# Altium PCB PDB.PcbDoc
Units mil, origin at the board's own origin, x right, y up, seen from the top; angles counter-clockwise.
Board outline 6000 x 4000 mil, 2 copper layers (Top Layer, Bottom Layer); 59 components, 36 nets, 188 pads, 0 vias.
Unrouted connection lines stored in the file: 128.
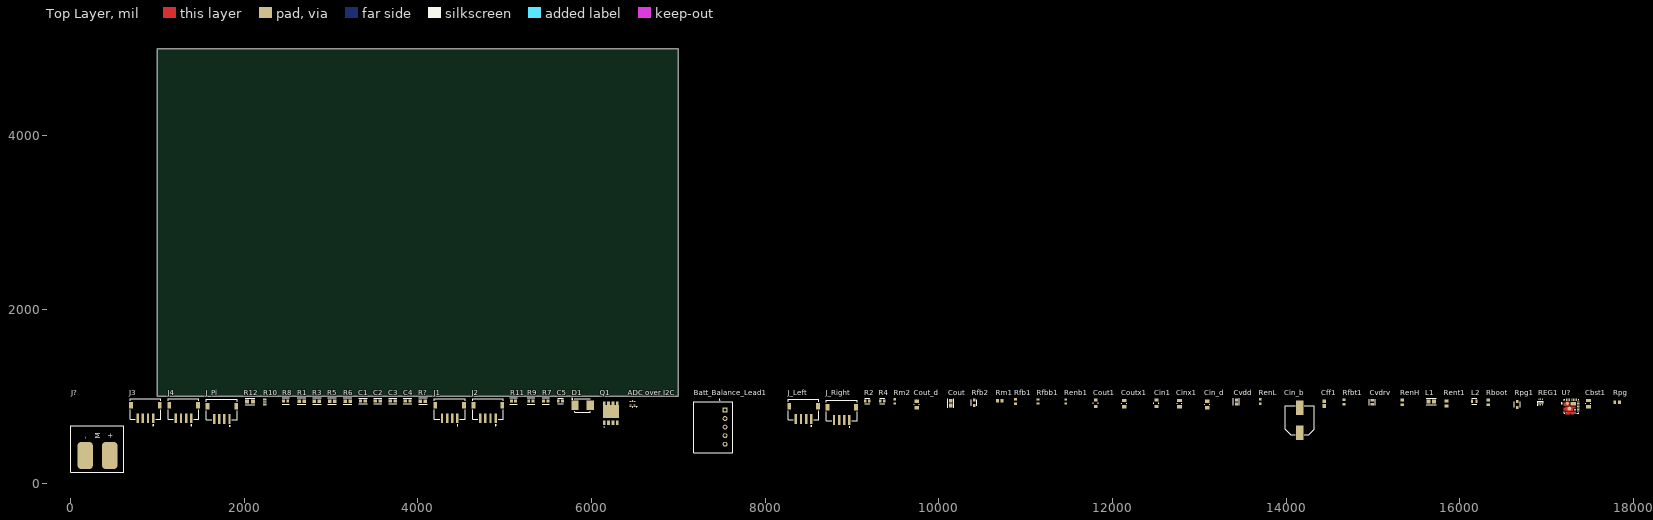
[diagram p0: Top Layer view]
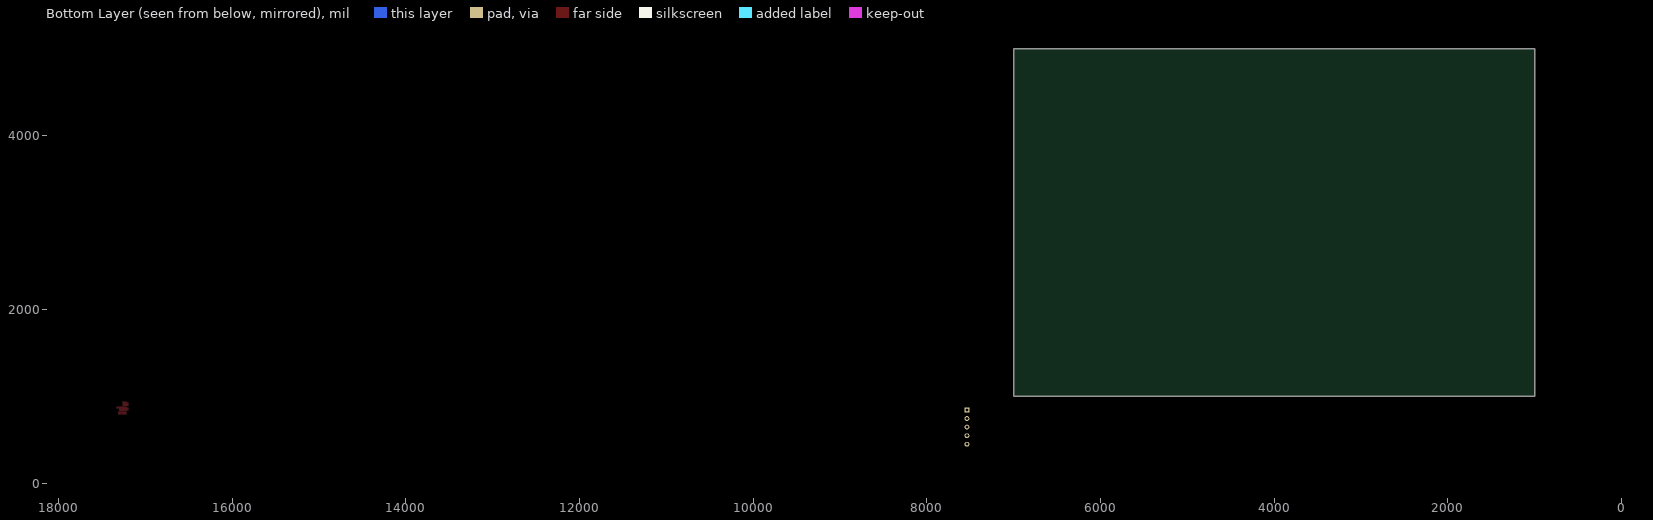
[diagram p1: Bottom Layer view, seen from below]

## Layer stack, top to bottom
Top Solder: solder mask 0.4, Solder Resist, Dk 3.5
Top Layer: signal copper 1.4
Dielectric 1: dielectric 12.6, FR-4, Dk 4.8
Bottom Layer: signal copper 1.4
Bottom Solder: solder mask 0.4, Solder Resist, Dk 3.5

## Board outline
1000,1000 7000,1000 7000,5000 1000,5000

## Design rules (kind name [scope] priority, off if disabled: settings)
BoardOutlineClearance [All] p1: gap=7.87 ignorepadtopadclearanceinfootprint=FALSE
Clearance [All] p1: gap=5 ignorepadtopadclearanceinfootprint=FALSE except(9.84: Arc-Hole Track-Hole SMDPad-Hole THPad-Hole Via-Hole Fill-Hole Poly-Hole Region-Hole Text-Hole)
ComponentClearance [All] p1: gap=5 collisioncheckmode=3 verticalgap=5 showdistances=TRUE
DiffPairsRouting [All] p1: maxlimit=10 minlimit=5 mostfreqgap=5 toplayer_minwidth=5 toplayer_maxwidth=1000 toplayer_prefwidth=5 bottomlayer_minwidth=5 bottomlayer_maxwidth=1000 bottomlayer_prefwidth=5 maxuncoupledlength=500
Height [All] p1: minheight=0 maxheight=71497.94 prefheight=500
HoleSize [All] p1: absolutevalues=TRUE maxlimit=248.03 minlimit=11.81 maxpercent=80.000 minpercent=20.000
HoleToHoleClearance [All] p1: gap=9.84 allowstackedmicrovias=FALSE
MinimumAnnularRing [All] p1: minimumring=3
MinimumSolderMaskSliver [All] p1: minsoldermaskwidth=0
PlaneClearance [All] p1: clearance=5
PlaneConnect PlaneConnectPowerPads [InPadClass('PowerPads')] p1: planeconnectstyle=Direct reliefexpansion=20 reliefentries=4 reliefconductorwidth=10 reliefairgap=10
PlaneConnect [All] p2: pad.planeconnectstyle=Relief pad.reliefexpansion=11.81 pad.reliefentries=4 pad.reliefconductorwidth=5 pad.reliefairgap=5 via.planeconnectstyle=Direct via.reliefexpansion=11.81 via.reliefentries=4 via.reliefconductorwidth=5 via.reliefairgap=5
PolygonConnect PolygonConnectPowerPads [All vs (InPadClass('PowerPads'))] p1: connectstyle=Direct reliefconductorwidth=10 reliefentries=4 polygonreliefangle="90 Angle" airgapwidth=10
PolygonConnect [All] p2: thpad.connectstyle=Relief thpad.reliefconductorwidth=5 thpad.reliefentries=4 thpad.polygonreliefangle="90 Angle" thpad.airgapwidth=5 smdpad.connectstyle=Relief smdpad.reliefconductorwidth=5 smdpad.reliefentries=4 smdpad.polygonreliefangle="90 Angle" smdpad.airgapwidth=5 via.connectstyle=Direct via.reliefconductorwidth=5 via.reliefentries=4 via.polygonreliefangle="90 Angle" via.airgapwidth=5
RoutingVias [All] p1: holewidth=11.81 width=23.62 viastyle="Through Hole" minholewidth=11.81 minwidth=23.62 maxholewidth=23.62 maxwidth=259.84
SilkToSilkClearance [All] p1: silktosilkclearance=0
SilkToSolderMaskClearance [IsPad] p1: minsilkscreentomaskgap=5 clearancetoexposedcopper=TRUE
SolderMaskExpansion [All] p1: expansion=2.95 istentingtop=FALSE
Width [All] p1: maxlimit=1000 minlimit=5 preferedwidth=5 minimp=50.000000 maximp=50.000000 favimp=50.000000
20 further rules are at their usual default settings.

## Components (designator, comment, footprint, x,y, rotation, side; value= is the part's Value field where it differs from the comment)
"ADC over I2C" "TLA2024IRUGT" ADS1018IRUGT 6471.5,910 r90 top
Batt_Balance_Lead1 "S5B-XH-A(LF)(SN)" FP-S5B-XH-A_LF_SN-MFG 7401.5,645 r90 top
C1 "0.47uF" FP-GRM188-0_1-e0_2_0_5-IPC_B 3366.5,945 r0 top
C2 "0.47uF" FP-GRM188-0_1-e0_2_0_5-IPC_B 3536.5,945 r0 top
C3 "0.47uF" FP-GRM188-0_1-e0_2_0_5-IPC_B 3711.5,945 r0 top
C4 "0.47uF" FP-GRM188-0_1-e0_2_0_5-IPC_B 3881.5,945 r0 top
C5 "0.1uF" FP-C0603-CJ-MFG 5641.5,945 r0 top value=100nF
Cbst1 "100nF" FP-CC0805-0_85-MFG 17481.5,915 r90 top value="100 nF"
Cff1 "10pF" CAPC1608X90X40ML10T20 14436.5,915 r90 top
Cin1 "22uF" FP-C2012-125-0_2-MFG 12506.5,920 r90 top
Cin_b "220uF" PNSC-EEE-FK1E221P_N 14156.5,725 r90 top
Cin_d "100nF" FP-CC0805-0_85-MFG 13091.5,905 r90 top value="100 nF"
Cinx1 "100nF" FP-CC0805-0_85-MFG 12771.5,915 r90 top value="100 nF"
Cout "47uF" FP-GRM188-0_2-IPC_B 10136.5,920 r90 top
Cout1 "22uF" FP-C2012-125-0_2-MFG 11806.5,920 r90 top
Cout_d "100nF" FP-CC0805-0_85-MFG 9746.5,905 r90 top value="100 nF"
Coutx1 "100nF" FP-CC0805-0_85-MFG 12136.5,915 r90 top value="100 nF"
Cvdd "1uF" FP-0603-L_1_6_0_15-W_0_8-IPC_C 13426.5,935 r90 top
Cvdrv "4.7uF" FP-C0603-CG-MFG 14991.5,930 r90 top
D1 "11.1V" ONSC-SMB-2-403A-03_J_V 5896.5,895 r0 top
J1 "S4B-ZR-SM4A-TF(LF)(SN)" FP-S4B-ZR-SM4A-TF_LF_SN-MFG 4366.5,855 r0 top
J2 "S4B-ZR-SM4A-TF(LF)(SN)" FP-S4B-ZR-SM4A-TF_LF_SN-MFG 4806.5,855 r0 top
J3 "S4B-ZR-SM4A-TF(LF)(SN)" FP-S4B-ZR-SM4A-TF_LF_SN-MFG 861.5,855 r0 top
J4 "S4B-ZR-SM4A-TF(LF)(SN)" FP-S4B-ZR-SM4A-TF_LF_SN-MFG 1301.5,855 r0 top
J? "XT60PT-M" XT60PT-M 311.5,550 r90 top
J_Left "S4B-ZR-SM4A-TF(LF)(SN)" FP-S4B-ZR-SM4A-TF_LF_SN-MFG 8441.5,845 r0 top
J_Pi "S4B-ZR-SM4A-TF(LF)(SN)" FP-S4B-ZR-SM4A-TF_LF_SN-MFG 1741.5,845 r0 top
J_Right "S4B-ZR-SM4A-TF(LF)(SN)" FP-S4B-ZR-SM4A-TF_LF_SN-MFG 8881.5,835 r0 top
L1 "4.7uH" FP-MLZ1608-IPC_A 15671.5,940 r0 top
L2 "1uH" FP-CBMF1608-MFG 16166.5,945 r0 top
Q1 "XPH4R714MC,L1XHQ" XPH4R714MC 6221.5,695 r0 top
R1 "100Ohm" FP-ERA3A-IPC_B 2661.5,945 r0 top
R2 "5.1kOhm" FP-CRCW0603-e3-IPC_C 9176.5,945 r0 top
R3 "100Ohm" FP-ERA3A-IPC_B 2836.5,945 r0 top
R4 "5.1kOhm" FP-CRCW0603-e3-IPC_C 9346.5,945 r0 top
R5 "100Ohm" FP-ERA3A-IPC_B 3011.5,945 r0 top
R6 "100Ohm" FP-ERA3A-IPC_B 3191.5,945 r0 top
R7 "10kOhm" FP-ERA3A-IPC_C 5471.5,945 r0 top
R8 "10kOhm" FP-ERA3A-IPC_C 2476.5,945 r0 top
R9 "10kOhm" FP-ERA3A-IPC_C 5301.5,945 r0 top
R10 "20kOhm" FP-ERA3A-MFG 2236.5,935 r90 top
R11 "10kOhm" FP-ERA3A-IPC_C 5101.5,945 r0 top
R12 "30kOhm" FP-ERJ3EK-IPC_A 2066.5,940 r0 top
R? "100Ohm" FP-ERA3A-IPC_B 4056.5,945 r0 top
Rboot "3.3Ohm" RESC1608X55X30NL15T15 16326.5,930 r90 top
REG1 "TPS564257DRLR" SOTFL50P160X60-6N 16931.5,935 r90 top
Renb1 "30kOhm" RESC1609X50X30LL10T20 11461.5,940 r90 top
RenH "562kOhm" RESC1608X55X30NL15T15 15336.5,930 r90 top
RenL "309kOhm" RESC1608X55X30LL15T15#1 13701.5,940 r90 top
Rent1 "255kOhm" RESC1608X55X30ML15T15 15846.5,915 r90 top
Rfb1 "113kOhm" RESC1608X55X30LL15T15#1 10881.5,940 r90 top
Rfb2 "10kOhm" FP-AC0603-MFG 10406.5,925 r90 top
Rfbb1 "30kOhm" RESC1609X50X30LL10T20 11141.5,940 r90 top
Rfbt1 "220kOhm" RESC1608X55X30LL15T15#2 14666.5,935 r90 top
Rm1 "100kOhm" RESC1608X55X30NL15T15 10701.5,950 r0 top
Rm2 "200kOhm" RESC1608X55X25LL10T15 9491.5,940 r90 top
Rpg "100kOhm" RESC1608X55X30NL15T15 17811.5,930 r0 top
Rpg1 "10kOhm" FP-AC0603-MFG 16661.5,905 r90 top
U? "SIC431AED-T1-GE3" FP-T22-0442-MFG 17286.5,885 r0 top

## Footprints (in the part's own frame and the unit in brackets; to place one, negate y for a bottom-side part, rotate by r counter-clockwise, add the part's x,y. Pads: shape width x height; smd on the part's side, far side on the other; paste and mask are expansions set on the pad)
ADS1018IRUGT [mm]
  rect 0.3x0.58 smd: 1(-0.75,-0.64) 4(0.75,-0.64) 6(0.75,0.64) 9(-0.75,0.64)
  rect 0.25x0.58 smd: 2(-0.25,-0.64) 3(0.25,-0.64) 7(0.25,0.64) 8(-0.25,0.64)
  rect 0.63x0.35 smd: 5(0.86,0) 10(-0.86,0)
  silkscreen extent -0.8,-1.25 -0.7,-1.15, body extent -1,-0.75 1,0.75, height 0.4
CAPC1608X90X40ML10T20 [mm] "Chip Capacitor, 2-Leads, Body 1.7x0.9mm, IPC Low Density"
  rect 1.05x1.05 smd: 1(-0.675,0) 2(0.675,0)
  body extent -0.85,-0.45 0.85,0.45, height 0.9
FP-0603-L_1_6_0_15-W_0_8-IPC_C [mil]
  rect 33.77x33.94 smd paste+0 mask+0: 1(-23.71,0) 2(23.71,0)
  silkscreen extent -41,-34 41,34, body extent -45,-23 45,23, height 10
FP-AC0603-MFG [mm]
  rect 0.9x0.8 smd paste+0 mask+0: 1(-0.85,0) 2(0.85,0)
  silkscreen extent -0.85,-0.82 0.85,0.82, body extent -1.4,-0.55 1.4,0.55, height 0.25
FP-C0603-CG-MFG [mm]
  rect 0.75x0.9 smd paste+0 mask+0: 1(-0.6,0) 2(0.6,0)
  silkscreen extent -0.87,-0.85 0.87,0.85, body extent -1.2,-0.6 1.2,0.6, height 0.25
FP-C0603-CJ-MFG [mm]
  rect 0.85x0.9 smd paste+0 mask+0: 1(-0.65,0) 2(0.65,0)
  silkscreen extent -0.8,-0.85 0.8,0.85, body extent -1.2,-0.6 1.2,0.6, height 0.25
FP-C2012-125-0_2-MFG [mm]
  rect 0.8x1.05 smd paste+0 mask+0: 1(-0.925,0) 2(0.925,0)
  silkscreen extent -0.15,-0.72 0.15,0.72, body extent -1.43,-0.82 1.43,0.82, height 0.25
FP-CBMF1608-MFG [mm]
  rect 0.55x1 smd paste+0 mask+0: 1(-0.625,0) 2(0.625,0)
  silkscreen extent -0.8,-0.87 0.8,0.87, body extent -1,-0.6 1,0.6, height 0.25
FP-CC0805-0_85-MFG [mm]
  rect 0.95x1.4 smd paste+0 mask+0: 1(-0.925,0) 2(0.925,0)
  silkscreen extent -0.08,-0.72 0.08,0.72, body extent -1.6,-1.05 1.6,1.05, height 0.25
FP-CRCW0603-e3-IPC_C [mil]
  rect 28.94x33.94 smd paste+0 mask+0: 1(-24.23,0) 2(24.23,0)
  silkscreen extent -30,-33 30,33, body extent -43,-23 43,23, height 10
FP-ERA3A-IPC_B [mil]
  rect 41.53x39.61 smd paste+0 mask+0: 1(-28.57,0) 2(28.57,0)
  silkscreen extent -49,-36 49,36, body extent -59,-30 59,30, height 10
FP-ERA3A-IPC_C [mil]
  rect 33.66x35.68 smd paste+0 mask+0: 1(-24.63,0) 2(24.63,0)
  silkscreen extent -41,-35 41,35, body extent -45,-24 45,24, height 10
FP-ERA3A-MFG [mm]
  rect 0.65x0.9 smd paste+0 mask+0: 1(-0.725,0) 2(0.725,0)
  silkscreen extent 0,-0.5 0,0.5, body extent -1.15,-0.6 1.15,0.6, height 0.25
FP-ERJ3EK-IPC_A [mil]
  rect 45.53x41.82 smd paste+0 mask+0: 1(-33.5,0) 2(33.5,0)
  silkscreen extent -56,-37 56,37, body extent -76,-41 76,41, height 10
FP-GRM188-0_1-e0_2_0_5-IPC_B [mil]
  rect 37.74x35.91 smd paste+0 mask+0: 1(-28.61,0) 2(28.61,0)
  silkscreen extent -47,-34 47,34, body extent -57,-28 57,28, height 10
FP-GRM188-0_2-IPC_B [mil]
  rect 43.51x39.61 smd paste+0 mask+0: 1(-27.58,0) 2(27.58,0)
  silkscreen extent -49,-36 49,36, body extent -59,-30 59,30, height 10
FP-MLZ1608-IPC_A [mil]
  rect 47.48x41.66 smd paste+0 mask+0: 1(-32.52,0) 2(32.52,0)
  silkscreen extent -56,-37 56,37, body extent -76,-41 76,41, height 10
FP-S4B-ZR-SM4A-TF_LF_SN-MFG [mm]
  rect 0.7x2.9 smd paste+0 mask+0: 1(2.25,-2.75) 2(0.75,-2.75) 3(-0.75,-2.75) 4(-2.25,-2.75)
  rect 1.1x1.9 smd paste+0 mask+0: 5(-4.2,1.05) 6(4.2,1.05)
  silkscreen extent -4.5,-4.9 4.5,3, body extent -4.85,-4.3 4.85,3.1, height 0.25
FP-S5B-XH-A_LF_SN-MFG [mm]
  rect 1.4x1.4 hole 0.9 paste-2539.97 mask+0: 1(5,-3.45)
  round 1.4 hole 0.9 paste-2539.97 mask+0: 2(2.5,-3.45) 3(0,-3.45) 4(-2.5,-3.45) 5(-5,-3.45)
  silkscreen extent -7.45,-5.75 8.17,5.75, body extent -7.55,-5.85 7.55,5.85, height 0.25
FP-T22-0442-MFG [mm]
  round 0.827 smd paste+0 mask+0: 1-2-26(-1.184,0.816)
  round 1.08 smd paste+0 mask+0: 3-4-27(-0.613,-0.675)
  round 0.272 smd paste+0 mask+0: 5-6-7-8-9(-1.444,-1.756)
  rect 0.3x0.73 smd paste+0 mask+0: 10(1.025,-1.935)
  rect 0.725x0.3 smd paste+0 mask+0: 11(1.937,-1.425) 12(1.937,-0.975) 13(1.937,-0.525) 14(1.937,-0.075) 15(1.937,0.375) 16(1.937,0.825) 17(1.937,1.275)
  rect 0.3x0.725 smd paste+0 mask+0: 18(1.475,1.937) 19(1.025,1.937) 20(0.575,1.937) 21(0.125,1.937) 22(-0.575,1.937) 23(-1.025,1.937) 24(-1.475,1.937)
  rect 1.575x1.05 smd paste+0 mask+0: 25(0.487,0.75)
  rect 0.58x0.38 smd paste+0 mask+0: 28(0.985,-0.99)
  Top Layer region: -1.625,-2.3 -1.625,-1.575 0.725,-1.575 0.725,-2.3 0.425,-2.3 0.425,-1.85 0.275,-1.85 0.275,-2.3 -0.025,-2.3 -0.025,-1.85 -0.425,-1.85 -0.425,-2.3 -0.725,-2.3 -0.725,-1.85 -0.875,-1.85 -0.875,-2.3 -1.175,-2.3 -1.175,-1.85 -1.325,-1.85 -1.325,-2.3
  Top Layer region: -2.3,-0.375 -1.75,-0.375 -1.75,-0.075 1.075,-0.075 1.075,-0.53 0.425,-0.53 0.425,-1.275 -1.75,-1.275 -1.75,-1.125 -2.3,-1.125 -2.3,-0.825 -1.75,-0.825 -1.75,-0.675 -2.3,-0.675 -2.3,-0.375
  Top Layer region: -2.3,0.975 -1.75,0.975 -1.75,1.275 -0.6,1.275 -0.6,0.225 -2.3,0.225 -2.3,0.525 -1.75,0.525 -1.75,0.675 -2.3,0.675 -2.3,0.975
  silkscreen extent -3,-2.05 2.05,2.05, body extent -2.4,-2.4 2.4,2.4, height 0.25
ONSC-SMB-2-403A-03_J_V [mil] "Molded, 2-Leads, Body 4.6x3.95mm"
  rect 85x107.99 smd: 1(-87.01,0) 2(87.01,0)
  silkscreen extent -125,-79 91,81, body extent -91,-78 91,78, height 97
PNSC-EEE-FK1E221P_N [mm] "CAPAE, 2-Leads, Body 8.5x8.5mm, IPC Medium Density"
  rect 4.2x2.1 smd: 1(-3.675,0) 2(3.675,0)
  silkscreen extent -4.25,-4.25 4.25,4.25, body extent -5,-4.25 5,4.25, height 10.5
RESC1608X55X25LL10T15 [mm] "Chip Resistor, 2-Leads, Body 1.60x0.80mm, IPC High Density"
  rect 0.6x0.8 smd: 1(-0.65,0) 2(0.65,0)
  body extent -0.85,-0.45 0.85,0.45, height 0.55
RESC1608X55X30LL15T15#1 [mm] "Chip Resistor, 2-Leads, Body 1.60x0.80mm, IPC High Density"
  rect 0.7x0.85 smd: 1(-0.625,0) 2(0.625,0)
  body extent -0.87,-0.48 0.87,0.48, height 0.55
RESC1608X55X30LL15T15#2 [mm] "Chip Resistor, 2-Leads, Body 1.75x0.95mm, IPC High Density"
  rect 0.75x0.85 smd: 1(-0.65,0) 2(0.65,0)
  body extent -0.87,-0.48 0.87,0.48, height 0.55
RESC1608X55X30ML15T15 [mm] "Chip Resistor, 2-Leads, Body 1.60x0.80mm, IPC Low Density"
  rect 0.9x1.05 smd: 1(-0.725,0) 2(0.725,0)
  body extent -0.87,-0.48 0.87,0.48, height 0.55
RESC1608X55X30NL15T15 [mm] "Chip Resistor, 2-Leads, Body 1.60x0.80mm, IPC Medium Density"
  rect 0.8x0.95 smd: 1(-0.675,0) 2(0.675,0)
  body extent -0.87,-0.48 0.87,0.48, height 0.55
RESC1609X50X30LL10T20 [mm] "Chip Resistor, 2-Leads, Body 1.55x0.85mm, IPC High Density"
  rect 0.7x0.85 smd: 1(-0.575,0) 2(0.575,0)
  body extent -0.82,-0.48 0.82,0.48, height 0.5
SOTFL50P160X60-6N [mm]
  rect 0.475x0.3 smd: 1(-0.838,0.5) 2(-0.838,0) 3(-0.838,-0.5) 4(0.838,-0.5) 5(0.838,0) 6(0.838,0.5)
  silkscreen extent -1.07,-0.8 0.25,0.9, body extent -0.8,-0.78 0.8,0.82, height 0.6
XPH4R714MC [mm]
  rect 0.85x1.45 smd: 1(-1.905,0) 2(-0.635,0) 3(0.635,0) 4(1.905,0)
  rect 0.85x1.05 smd: 5(1.905,5.7) 6(0.635,5.7) 7(-0.635,5.7) 8(-1.905,5.7)
  rect 4.7x3.75 smd: 9(0,3.3)
  silkscreen extent -1.95,-1.25 -1.86,-1.15, body extent -2.65,-0.25 2.65,5.75, height 0.95
XT60PT-M [mm]
  rect 1x1 hole 1.5 square: 8(1.15,6.75) 8(1.15,-6.65)
  rrect50% 8x4.5 smd: +(-5.9,-3.55) -(-5.9,3.65)
  silkscreen extent -10.8,-7.7 2.85,7.8

## Part data
"ADC over I2C": "Integrated Circuit", Manufacturer_Name="Texas Instruments", Mouser Part Number=595-TLA2024IRUGT, Arrow Part Number=TLA2024IRUGT, Arrow Price/Stock=https://www.arrow.com/en/products/tla2024irugt/texas-instruments?region=nac, Datasheet Link=http://www.ti.com/lit/ds/sbas846/sbas846.pdf, Height=0.4mm, Manufacturer_Part_Number=TLA2024IRUGT, Mouser Price/Stock=https://www.mouser.co.uk/ProductDetail/Texas-Instruments/TLA2024IRUGT?qs=chTDxNqvsylxt6cbA39OGw%3D%3D
Batt_Balance_Lead1: library part CMP-17439-000302-1, "CONN HEADER R/A 5POS 2.5MM", Color=Natural, Contact Resistance=10mR, Current Rating=3A, Flammability Rating="UL94 V-0", Insulation Resistance=1GR, Max Operating Temperature=85°C, Min Operating Temperature=-25°C, Voltage Rating=250V, Connector Type=Header, Contact Finish - Mating=TIN, Contact Material=Brass, Contact Plating=Tin, Contact Shape=Square, Contact Type="Male Pin", Fastening Type=Detent, Insulation Color=Natural, Insulation Material=Nylon, Lead Free="Lead Free", Lead Pitch=2.5mm, Mount="Through Hole", Number of Contacts=5, Number of Positions=5, Number of Rows=1, Orientation="Right Angle", Packaging=Bulk, Pitch=2.5mm, REACH SVHC="No SVHC", Series=XH, Termination=Solder, Voltage Rating (AC)=250V, Wire/Cable Gauge=22AWG
C1 C2 C3 C4: library part CMP-2006-02860-2, "Chip Multilayer Ceramic Capacitors for General Purpose, 0603, 0.47uF, X7R, 15%, 10%, 16V", Capacitance=470nF, Case Code (Imperial)=0603, Case Code (Metric)=1608, Dielectric=X7R, Max Operating Temperature=125°C, Min Operating Temperature=-55°C, Package Quantity=1, Tolerance=10%, Voltage=16V, Case/Package=0603, Depth=0.8mm, Height=0.8mm, Lead Free="Lead Free", Length=1.6mm, Material=Ceramic, Mount="Surface Mount", Number of Pins=2, Packaging="Tape and Reel", REACH SVHC="No SVHC", Termination=SMD/SMT, Thickness=0.035inch, Voltage Rating=16V, Voltage Rating (DC)=16V, Width=0.8mm
C5: library part CMP-2006-03300-2, "CAP CER 0.1UF 50V X7R 0603", Capacitance=100nF, Manufacturer=Kemet, Manufacturer Part Number=C0603X104K5RACTU, Package=C0603-CJ, Temperature="-55°C to +125°C", Temperature Characteristic=X7R, Temperature Coefficient=15%, Temperature Range High=+125°C, Temperature Range Low=-55°C, Tolerance=10%, Voltage=50V, Automotive=No, Category=Cap, ComponentLink2Description=Datasheet, ComponentLink2URL=https://content.kemet.com/datasheets/KEM_C1013_X7R_FT-CAP_SMD.pdf, Device Class L1="Passive Components", Device Class L2=Capacitors, Device Class L3="Ceramic Capacitors", Digikey Description="CAP CER 0.1UF 50V X7R 0603", Height=0.95mm, Ipc Land Pattern Name=CAPC16080X80, Lead Free=Yes, Material=Ceramic, Mouser Description="Capacitor; Ceramic; Cap 0.1uF; Tol+10%; SMT; Flexible Termination; Vol-Rtg 50V; TR", Octopart=https://octopart.com/c0603x104k5ractu-kemet-9145062, RoHS=TRUE, Voltage Rating=50V
Cbst1 Cin_d Cinx1 Cout_d Coutx1: library part CMP-1036-04410-2, "CAP CER 0.1UF 25V X7R 0805", Capacitance="100 nF", Manufacturer=Yageo, Manufacturer Part Number=CC0805KRX7R8BB104, Package=CC0805-0.85, Temperature="-30°C to +85°C", Temperature Characteristic=X7R, Temperature Range High=+85°C, Temperature Range Low=-30°C, Tolerance=0.1, Voltage Rating="25 V", Automotive=No, Category=Cap, ComponentLink2Description=Datasheet, ComponentLink2URL=http://www.yageo.com/documents/recent/UPY-GPHC_Y5V_6.3V-to-50V_8.pdf, Device Class L1="Passive Components", Device Class L2=Capacitors, Device Class L3="Ceramic Capacitors", Digikey Description="CAP CER 0.1UF 25V X7R 0805", Footprint Url=http://www.yageo.com/exep/pages/download/literatures/UPY-C_GEN_24.pdf, Height=0.95mm, Ipc Land Pattern Name=CAPC200125X85, Lead Free=Yes, Material=Ceramic, Mouser Description="Multilayer Ceramic Capacitors MLCC - SMD/SMT 100nF 25V X7R 10%", Octopart=https://octopart.com/cc0805krx7r8bb104-yageo-39467766, RoHS=TRUE
Cff1: library part CMP-2100-03593-1, "Chip Capacitor, 10 pF, +/- 5%, 50 V, -55 to 125 degC, 0603 (1608 Metric), RoHS, Tape and Reel", Case Code (Imperial)=0603, Case Code (Metric)=1608, Dielectric=C0G, Insulation Resistance=100GR, Manufacturer=Yageo, Max Operating Temperature=125degC, Min Operating Temperature=-55degC, Package Description="2-Pin Surface Mount Device, Body 1.6 x 0.8 mm", Package Quantity=1, Temperature Coefficient=30ppm/degC, Tolerance=5%, Voltage=50V, Capacitance=10pF, Case/Package=0603, Composition=Ceramic, Datasheet URL=http://www.yageo.com/documents/recent/UPY-GP_NP0_16V-to-50V_14.pdf, Datasheet Version="Rev. 14, 07/2016", Depth=0.8mm, Height=0.8mm, Lead Free=LeadFree, Length=1.6mm, Manufacturer URL=http://www.yageo.com/, Mount=SurfaceMount, Number of Pins=2, Package Reference=0603, Packaging=TapeandReel, Radiation Hardening=No, REACH SVHC=NoSVHC, RoHSCompliant=True, Termination=SMD/SMT, Thickness=0.035inch, Voltage Rating=50V, Voltage Rating (DC)=50V, Width=0.031inch
Cin1 Cout1: library part CMP-08246-000038-3, "CAP CER 22UF 25V X5R 0805", Capacitance=22µF, Case Code (Imperial)=0805, Case Code (Metric)=2012, Dielectric=X5R, Dielectric Material=Ceramic, Manufacturer Lifecycle Status=PRODUCTION, Max Operating Temperature=85°C, Min Operating Temperature=-55°C, Tolerance=20%, Voltage Rating=25V, Case/Package=0805, Composition=Ceramic, Depth=1.25mm, Height=1.25mm, Lead Free="Lead Free", Length=2mm, Lifecycle Status=Production, Material=Ceramic, Max Length=2.2mm, Max Width=1.45mm, Min Length=1.8mm, Min Width=1.05mm, Mount="Surface Mount", NexarPartId=26013714, Packaging="Cut Tape (CT)", REACH SVHC="No SVHC", RoHS=Compliant, Schedule B="8532240020, 8532240020", Termination=SMD/SMT, Thickness=1.4478mm, Voltage Rating (DC)=25V, Weight=5.499807mg, Width=1.25mm
Cin_b: library part CMP-1665-00017-3, "Aluminum Electrolytic Capacitor, 220 uF, +/- 20%, 25 V, -55 to 105 degC, 2-Pin CAPAE, RoHS, Tape and Reel", Manufacturer=Panasonic, Max Operating Temperature="105 degC", Min Operating Temperature="-55 degC", Package Quantity=500, Voltage Rating="25 V", ComponentLink1Description="Manufacturer URL", ComponentLink1URL=http://www.panasonic.com/, ComponentLink2Description=Datasheet, ComponentLink2URL=http://industrial.panasonic.com/cdbs/www-data/pdf/RDE0000/ABA0000C1181.pdf, DatasheetVersion=03/2016, Height="10.2 mm", Lead Pitch="3.1 mm", Length="10.2 mm", Mount="Surface Mount", Mounting Technology="Surface Mount", PackageDescription="2-Pin Electrolytic Aluminum Capacitor, Body 8.3 x 8.3 mm", PackageReference=EEE-FK1E221P, Packaging="Tape and Reel", Pins=2, REACH SVHC="No SVHC", RoHSCompliant=true
Cout: library part CMP-2000-05444-2, "Chip Multilayer Ceramic Capacitors for General Purpose, 0603, 47uF, X5R, 15%, 20%, 6.3V", Case Code (Imperial)=0603, Case Code (Metric)=1608, Dielectric=X5R, Max Operating Temperature=85°C, Min Operating Temperature=-55°C, Tolerance=20%, Voltage Rating=6.3V, Capacitance=47uF, Case/Package=0603, Length=0.063inch, Mount="Surface Mount", Packaging="Tape and Reel", Thickness=0.039inch, Voltage Rating (DC)=6.3V, Width=0.031inch
Cvdd: library part CMP-2000-07531-4, "Ceramic Capacitor General Use 1uF ±10% 50V X7R 0603", Case Code (Imperial)=0603, Case Code (Metric)=1608, Dielectric=X7R, Max Operating Temperature=125°C, Min Operating Temperature=-55°C, Package Quantity=1, Tolerance=10%, Voltage Rating=50V, Capacitance=1uF, Case/Package=0603, Construction=Flat, Depth=0.8mm, Halogen Free="Halogen Free", Height=0.8mm, Length=1.6mm, Mount="Surface Mount", Packaging="Tape and Reel", Radiation Hardening=No, RoHS Compliant=Yes, Series=M, Termination=SMD/SMT, Thickness=0.037inch, Voltage Rating (DC)=50V, Width=0.031inch
Cvdrv: library part CMP-2006-02256-2, "CAP CER 4.7UF 6.3V X5R 0603", Manufacturer=Kemet, Manufacturer Part Number=C0603C475K9PACTU, Package=C0603-CG, Temperature="-55°C to +85°C", Temperature Characteristic=X5R, Temperature Coefficient=15%, Temperature Range High=+85°C, Temperature Range Low=-55°C, Tolerance=10%, Voltage Rating=6.3V, Automotive=No, Capacitance=4.7uF, Category=Cap, ComponentLink2Description=Datasheet, ComponentLink2URL=https://content.kemet.com/datasheets/KEM_C1006_X5R_SMD.pdf, Device Class L1="Passive Components", Device Class L2=Capacitors, Device Class L3="Ceramic Capacitors", Digikey Description="CAP CER 4.7UF 6.3V X5R 0603", Height=0.9mm, Ipc Land Pattern Name=CAPC16080X80, Lead Free=Yes, Material=Ceramic, Mouser Description="Multilayer Ceramic Capacitors MLCC - SMD/SMT 6.3volts 4.7uF X5R 10%", Octopart=https://octopart.com/c0603c475k9pactu-kemet-104242, RoHS=TRUE
D1: library part CMP-1061-00396-1, "600 W Peak Power Zener Transient Voltage Suppressor, Unidirectional, 2-Pin SMB, Pb-Free, Tape and Reel", Manufacturer="On Semiconductor", PartNumber=P6SMB13AT3G, ComponentLink1Description="Manufacturer URL", ComponentLink1URL=http://www.onsemi.com/, ComponentLink2Description=Datasheet, ComponentLink2URL=http://www.onsemi.com/pub_link/Collateral/P6SMB6.8AT3-D.PDF, ComponentLink3Description="Package Specification", ComponentLink3URL=http://www.onsemi.com/pub_link/Collateral/P6SMB6.8AT3-D.PDF, DatasheetVersion="Rev. J", Direction=Unidirectional, IR Max (uA)=5, Mounting Technology="Surface Mount", PackageDescription="2-Pin Small Molded Package, J-Bend Lead, Body 4.33 x 3.625 mm", PackageReference=SMB-2-403A-03_J, PackageVersion="Rev. J, 07/2012", Packing="Tape and Reel", PPK Max (W)=600, RoHS=Pb-Free, V(BR) Typ (V)=13.05
J1 J2 J3 J4 J_Left J_Pi J_Right: library part CMP-17439-000081-1, "CONN HEADER SMD R/A 4POS 1.5MM", Color=Natural, Contact Resistance=30mR, Current Rating=1A, Flammability Rating="UL94 V-0", Housing Color=Beige, Max Operating Temperature=85°C, Max Voltage Rating (AC)=50V, Min Operating Temperature=-25°C, Connector Type=Header, Contact Finish - Mating=TIN, Contact Material=Brass, Contact Plating=Copper, Contact Shape=Circular, Contact Type="Male Pin", Depth=6.5mm, Fastening Type=Detent, Gender=Male, Height=7.2mm, Housing Material=Polyamide, Insulation Color=Natural, Insulation Material=Nylon, Lead Free="Lead Free", Length=9mm, Max Current Rating=1A, Max Voltage Rating (DC)=50V, Mount="Surface Mount", Number of Contacts=4, Number of Positions=4, Number of Rows=1, Orientation="Right Angle", Packaging="Tape and Reel", Pitch=1.5mm, Series=ZH, Termination=Solder, Voltage Rating=50V, Width=3.5mm
J?: "Male SMT XT60 Connector"
L1: library part CMP-08253-000311-1, "Shielded Multilayer Inductor 4.7uH ±20% 350mA 650mΩ SMD 0603", Case Code (Imperial)=0603, Case Code (Metric)=1608, Current Rating=350mA, DC Resistance (DCR)=650mR, Max Operating Temperature=125°C, Min Operating Temperature=-55°C, Package Quantity=4000, Saturation Current=120mA, Self Resonant Frequency=80MHz, Test Frequency=2MHz, Tolerance=20%, Case/Package=0603, Core Material=Ferrite, Height - Seated (Max)=0.037inch, Inductance=4.7uH, Length=0.063inch, Mount="Surface Mount", Packaging="Tape and Reel", RoHS Compliant=Yes, Shielding=Shielded, Width=0.031inch
L2: library part CMP-14484-000279-1, "FIXED IND 1UH 770MA 117 MOHM SMD", Case Code (Imperial)=0603, Case Code (Metric)=1608, Current Rating=770mA, DC Resistance (DCR)=117mR, Inductance Tolerance=20%, Max Operating Temperature=105°C, Min Operating Temperature=-40°C, Package Quantity=1, Resistor Type=Wirewound, Saturation Current=290mA, Self Resonant Frequency=100MHz, Test Frequency=7.96MHz, Case/Package=0603, Core Material=Ferrite, DC Current=770mA, Depth=1mm, Halogen Free="Halogen Free", Height=0.8mm, Height - Seated (Max)=0.039inch, Inductance=1uH, Lead Free="Lead Free", Length=1.6mm, Max DC Current=770mA, Military Standard=Not, Mount="Surface Mount", Packaging="Tape and Reel", Radiation Hardening=No, RoHS Compliant=Yes, Series=CBMF, Shielding=Unshielded, Termination=SMD/SMT, Tolerance=20%, Width=0.031inch
Q1: "MOSFET (P-Channel)", Manufacturer_Name=Toshiba, Mouser Part Number=757-XPH4R714MC,L1XHQ, Arrow Part Number=XPH4R714MC,L1XHQ, Arrow Price/Stock=https://www.arrow.com/en/products/xph4r714mcl1xhq/toshiba?region=nac, Datasheet Link=https://toshiba.semicon-storage.com/info/docget.jsp?did=66018&prodName=XPH4R714MC, Manufacturer_Part_Number=XPH4R714MC,L1XHQ, Mouser Price/Stock=https://www.mouser.co.uk/ProductDetail/Toshiba/XPH4R714MCL1XHQ?qs=7MVldsJ5Uay5UfLPuZnPLQ%3D%3D
R1 R3 R5 R6 R?: library part CMP-2000-00870-2, "RES SMD 100 OHM 0.1% 1/10W 0603", Case Code (Imperial)=0603, Case Code (Metric)=1608, Max Operating Temperature=155°C, Max Power Dissipation=100mW, Min Operating Temperature=-55°C, Package Quantity=5000, Resistance=100R, Resistance Tolerance=0.1%, Resistor Type="Thin Film", Temperature Coefficient=25ppm/°C, Voltage Rating=75V, Case/Package=0603, Construction=Rectangular, Contact Plating=Tin, Depth=0.8mm, Height=0.45mm, Length=1.6mm, Military Standard=Not, Mount="Surface Mount", Number of Pins=2, Number of Terminations=2, Packaging="Tape and Reel", Power Rating=100mW, Radiation Hardening=No, REACH SVHC="No SVHC", RoHS Compliant=Yes, Series=ERA-3A, Size Code=0603, Technology="METAL FILM", Termination=SMD/SMT, Tolerance=0.1%, Width=0.8mm
R2 R4: library part CMP-1012-00590-3, "RES Thick Film, 5.1kΩ, 1%, 0.1W, 100ppm/°C, 0603", Case Code (Imperial)=0603, Case Code (Metric)=1608, Max Operating Temperature=155°C, Min Operating Temperature=-55°C, Package Quantity=5000, Power Rating=100mW, Resistance=5.1kR, Temperature Coefficient=100ppm/°C, Tolerance=1%, Voltage Rating=75V, Case/Package=0603, Composition="Thick Film", Contact Plating=Tin, Depth=0.85mm, Height=0.45mm, Lead Free="Lead Free", Length=1.55mm, Military Standard=Not, Mount="Surface Mount", Packaging="Tape and Reel", Radiation Hardening=No, Termination=SMD/SMT, Voltage Rating (DC)=75V, Weight=7.1E-05oz, Width=0.85mm
R7 R8 R9 R11: library part CMP-2000-00874-2, "RES SMD 10K OHM 0.1% 1/10W 0603", Case Code (Imperial)=0603, Case Code (Metric)=1608, Max Operating Temperature=155°C, Max Power Dissipation=100mW, Min Operating Temperature=-55°C, Package Quantity=5000, Resistance=10kR, Resistance Tolerance=0.1%, Resistor Type="Thin Film", Temperature Coefficient=25ppm/°C, Voltage Rating=75V, Case/Package=0603, Construction=Rectangular, Contact Plating=Tin, Depth=0.8mm, Height=0.45mm, Lead Free="Lead Free", Length=1.6mm, Military Standard=Not, Mount="Surface Mount", Number of Pins=2, Number of Terminations=2, Packaging="Tape and Reel", Power Rating=100mW, Radiation Hardening=No, REACH SVHC="No SVHC", RoHS Compliant=Yes, Series=ERA-3A, Size Code=0603, Technology="METAL FILM", Termination=SMD/SMT, Tolerance=0.1%, Voltage Rating (DC)=75V, Width=0.8mm
R10: library part CMP-2000-00946-2, "RES SMD 20K OHM 0.1% 1/10W 0603", Case Code (Imperial)=0603, Case Code (Metric)=1608, Max Operating Temperature=155°C, Max Power Dissipation=100mW, Min Operating Temperature=-55°C, Package Quantity=5000, Resistance=20kR, Resistance Tolerance=0.1%, Resistor Type="Thin Film", Temperature Coefficient=25ppm/°C, Voltage Rating=75V, Case/Package=0603, Construction=Rectangular, Contact Plating=Tin, Depth=0.8mm, Height=0.45mm, Lead Free="Lead Free", Length=1.6mm, Military Standard=Not, Mount="Surface Mount", Number of Pins=2, Number of Terminations=2, Packaging="Tape and Reel", Power Rating=100mW, Radiation Hardening=No, REACH SVHC="No SVHC", RoHS Compliant=Yes, Series=ERA, Size Code=0603, Technology="THIN FILM", Termination=SMD/SMT, Tolerance=0.1%, Voltage Rating (DC)=75V, Weight=7.1E-05oz, Width=0.8mm
R12: library part CMP-2000-00413-2, "RES SMD 30K OHM 1% 1/10W 0603", Case Code (Imperial)=0603, Case Code (Metric)=1608, Max Operating Temperature=155°C, Max Power Dissipation=100mW, Min Operating Temperature=-55°C, Package Quantity=1, Resistance=30kR, Resistance Tolerance=1%, Resistor Type="Thick Film", Temperature Coefficient=100ppm/°C, Voltage Rating=75V, Case/Package=0603, Construction=Rectangular, Contact Plating=Tin, Depth=0.8mm, Features="Automotive AEC-Q200", Height=0.022inch, Lead Free="Lead Free", Length=1.6mm, Military Standard=Not, Mount="Surface Mount", Number of Terminations=2, Packaging="Tape and Reel", Power Rating=100mW, Radiation Hardening=No, REACH SVHC="No SVHC", RoHS Compliant=Yes, Series=ERJ, Size Code=0603, Termination=SMD/SMT, Tolerance=1%, Voltage Rating (DC)=75V, Width=0.031inch
Rboot: library part CMP-2000-00847-1, Manufacturer=Panasonic, Part Number=ERJ-3RQF3R3V
REG1: "Integrated Circuit", Manufacturer_Name="Texas Instruments", Mouser Part Number=595-TPS564257DRLR, Datasheet Link=https://www.ti.com/lit/ds/symlink/tps564257.pdf?HQS=dis-mous-null-mousermode-dsf-pf-null-wwe&ts=1695023870951&ref_url=https%253A%252F%252Fwww.mouser.de%252F, Height=0.6mm, Manufacturer_Part_Number=TPS564257DRLR, Mouser Price/Stock=https://www.mouser.co.uk/ProductDetail/Texas-Instruments/TPS564257DRLR?qs=ulEaXIWI0c8amaZvnJWTQQ%3D%3D
Renb1 Rfbb1: library part CMP-2000-03223-1, Manufacturer="Vishay Dale", Part Number=CRCW060330K0FKEA
RenH: library part CMP-2000-00571-1, Manufacturer=Panasonic, Part Number=ERJ-3EKF5623V
RenL: library part CMP-2000-00422-1, Manufacturer=Panasonic, Part Number=ERJ-3EKF3093V
Rent1: library part CMP-1012-00780-2, Manufacturer=Panasonic, Part Number=ERJ-3EKF2553V
Rfb1: library part CMP-2000-00204-1, Manufacturer=Panasonic, Part Number=ERJ-3EKF1133V
Rfb2 Rpg1: library part CMP-2000-04818-3, "RES 10KΩ 1.00% 0.1W 0603", Case Code (Imperial)=0603, Case Code (Metric)=1608, Max Operating Temperature=155°C, Max Power Dissipation=100mW, Min Operating Temperature=-55°C, Package Quantity=1, Ratings=AEC-Q200, Resistance=10kR, Resistor Type="Thick Film", Temperature Coefficient=100ppm/°C, Tolerance=1%, Voltage Rating=50V, Case/Package=0603, Construction=Rectangular, Depth=0.8mm, Features="Moisture Resistant", Height=0.45mm, Lead Free="Lead Free", Length=1.6mm, Military Standard=Not, Mount="Surface Mount", Number of Terminations=2, Packaging="Tape and Reel", Power Rating=100mW, RoHS Compliant=Yes, Series=AC, Size Code=0603, Termination=SMD/SMT, Width=0.8mm
Rfbt1: library part CMP-2000-00338-2, "Chip Resistor, 220 KOhm, +/- 1%, 0.1 W, -55 to 155 degC, 0603 (1608 Metric), RoHS, Tape and Reel", Frequency="2450 MHz", Max Operating Temperature=80degC, Min Operating Temperature=-20degC, Package Quantity=3000, ComponentLink1Description="Manufacturer URL", ComponentLink1URL=http://www.panasonic.com/, ComponentLink2Description=Datasheet, ComponentLink2URL=http://industrial.panasonic.com/cdbs/www-data/pdf/RDA0000/AOA0000C86.pdf, DatasheetVersion=Apr-15, Height="0.5 mm", Impedance="50 Ohm", Length="3.2 mm", Mount="Surface Mount", PackageDescription="2-Pin Surface Mount Device, Body 1.6 x 0.85 mm", PackageReference=0603, Packaging="Tape and Reel", Pins=2, Radiation Hardening=No, REACH SVHC="No SVHC", RoHSCompliant=True, Width="1.6 mm"
Rm1 Rpg: library part CMP-2000-00705-1, Manufacturer=Panasonic, Part Number=ERJ-3GEYJ104V
Rm2: library part CMP-2000-04252-1, Manufacturer=Yageo, Part Number=RC0603JR-07200KL
U?: library part CMP-00030-87948104-1, "SIC431AED-T1-GE3 IC Reg Buck Adj 24A MLP44-24", Ambient Temperature Range High=105°C, Max Junction Temperature (Tj)=125°C, Max Supply Voltage=24V, Min Operating Temperature=-40°C, Min Supply Voltage=3V, Output Current=24A, Output Voltage=20V, Height=800µm, Max Operating Temperature=125°C, NexarPartId=87948104, Number of Outputs=1, RoHS=Non-Compliant, Schedule B="8542390000, 8542390000"

## Nets (pads, with @x,y where several pads share a name; then routed paths per layer and width w, separated by ;. In a path a pad name is that pad's centre, name@x,y a point inside that pad or via, vN(x,y) a via of type N, cw(c..) or ccw(c..) an arc to the next point about the centre after c; other vN are vias at no path point)
+5: "ADC over I2C.8" C5.2 Cff1.2 Cout1.1 Coutx1.1 L1.2 R2.2 R4.2 Rfbt1.2 Rpg1.2
+7.4: Cout.1 Cout_d.1 L2.2 Rfb1.2 U?.18
ADC_Batt_Cell1: Batt_Balance_Lead1.2 R1.2
ADC_Batt_Cell2: R3.2 R7.1 R8.1
ADC_Batt_Cell3: R5.2 R9.1 R10.2
ADC_Batt_Cell4: R6.2 R11.1 R12.2
"Batt in": D1.2 J?.+ Q1.4 Q1.5 Q1.6 Q1.7 Q1.8 Q1.9 R?.2
Batt_rev_proc: Cin1.1 Cinx1.1 D1.1 Q1.1 Q1.2 Q1.3 REG1.1 Rent1.2
I2C_GND: J1.4 J2.4 J3.4 J4.4 J_Left.4 J_Pi.4 J_Right.4
I2C_SCL: "ADC over I2C.10" J1.3 J2.3 J3.2 J3.3 J4.2 J4.3 J_Left.3 J_Pi.3 J_Right.3 R2.1
I2C_SDA: "ADC over I2C.9" J1.2 J2.2 J_Left.2 J_Pi.2 J_Right.2 R4.1
I2C_VCC: J1.1 J2.1 J3.1 J4.1 J_Left.1 J_Pi.1 J_Right.1
"NetADC over I2C_4": "ADC over I2C.4" C1.1 R1.1
"NetADC over I2C_5": "ADC over I2C.5" C2.1 R3.1
"NetADC over I2C_6": "ADC over I2C.6" C3.1 R5.1
"NetADC over I2C_7": "ADC over I2C.7" C4.1 R6.1
NetBatt_Balance_Lead1_3: Batt_Balance_Lead1.3 R7.2
NetBatt_Balance_Lead1_4: Batt_Balance_Lead1.4 R9.2
NetBatt_Balance_Lead1_5: Batt_Balance_Lead1.5 R11.2
NetCbst1_1: Cbst1.1 U?.23
NetCbst1_2: Cbst1.2 Rboot.2
NetCff1_1: Cff1.1 REG1.6 Rfbb1.2 Rfbt1.1
NetCin_b_1: Cin_b.1 Cin_d.1 RenH.2 U?.1-2-26 U?.22
NetCvdd_1: Cvdd.1 Rm1.1 Rpg.1 U?.15
NetCvdrv_2: Cvdrv.2 U?.12
NetL2_1: L2.1 U?.5-6-7-8-9
NetRboot_1: Rboot.1 U?.24
NetREG1_4: REG1.4 Rpg1.1
NetRenH_1: RenH.1 RenL.2 U?.19
NetRfb1_1: Rfb1.1 Rfb2.2 U?.17
NetRm1_2: Rm1.2 U?.21
NetRm2_2: Rm2.2 U?.20
REG5v_EN: REG1.5 Renb1.2 Rent1.1
REG5v_SW: L1.1 REG1.2
REG7.4V_AGND: "ADC over I2C.1" "ADC over I2C.3" Batt_Balance_Lead1.1 C1.2 C2.2 C3.2 C4.2 C5.1 Cin1.2 Cin_b.2 Cin_d.2 Cinx1.2 Cout1.2 Cout.2 Cout_d.2 Coutx1.2 Cvdd.2 Cvdrv.1 J?.- R8.2 R10.1 R12.1 R?.1 REG1.3 Renb1.1 RenL.1 Rfb2.1 Rfbb1.1 Rm2.1 U?.3-4-27 U?.13 U?.16 U?.25
REG7.4v_PGOOD: Rpg.2 U?.14
pads on no net: "ADC over I2C.2" J1.5 J1.6 J2.5 J2.6 J3.5 J3.6 J4.5 J4.6 J?.8 J_Left.5 J_Left.6 J_Pi.5 J_Pi.6 J_Right.5 J_Right.6 U?.10 U?.11 U?.28

## Text inside footprints (layer, text, board x,y; h text height)
J?: Top Overlay "+" at 482.76,510.63 h59.06 r90; Top Overlay "-" at 197.33,506.69 h59.06 r90; Top Overlay "M" at 343.63,512.87 h59.06 r90; Mechanical 1 "PCB Edge" at 374.49,668.11 h19.68 r180